# Altium PCB TFT_2.2-inch_ILI9341_Pcb.PcbDoc
Units mil, origin at the board's own origin, x right, y up, seen from the top; angles counter-clockwise.
Board outline 2670 x 1610 mil, 2 copper layers (Top Layer, Bottom Layer); 19 components, 13 nets, 87 pads, 24 vias.
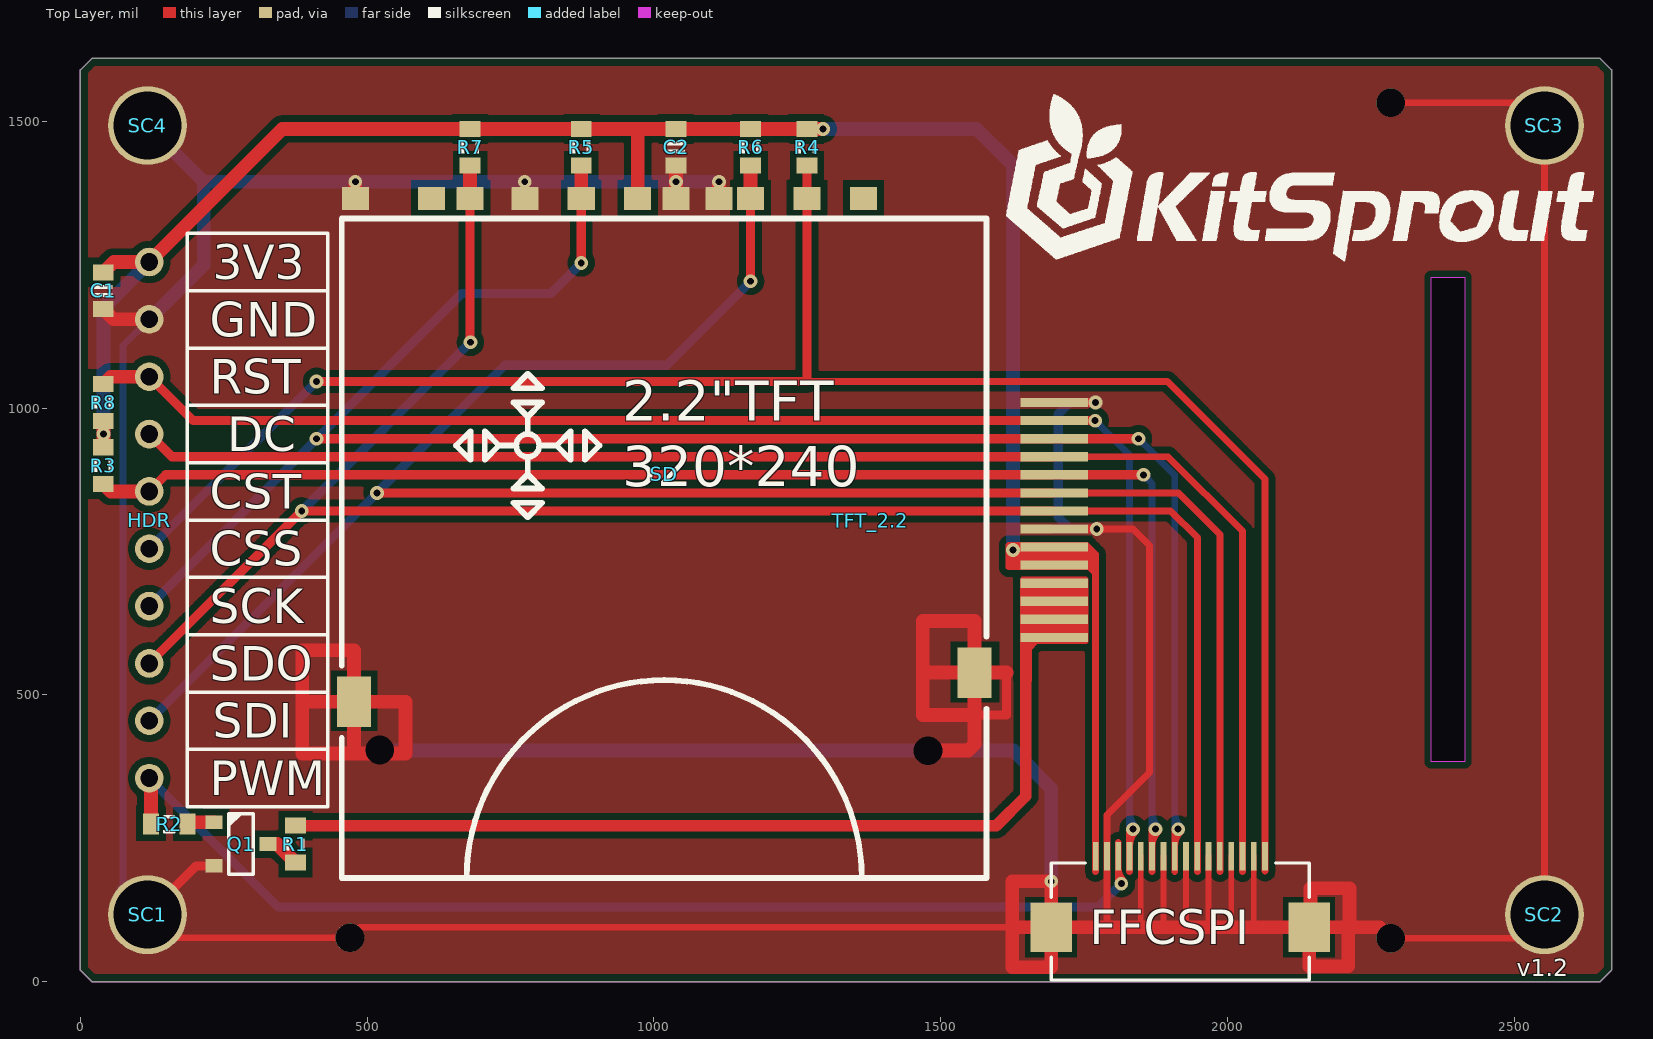
[diagram p0: Top Layer view]
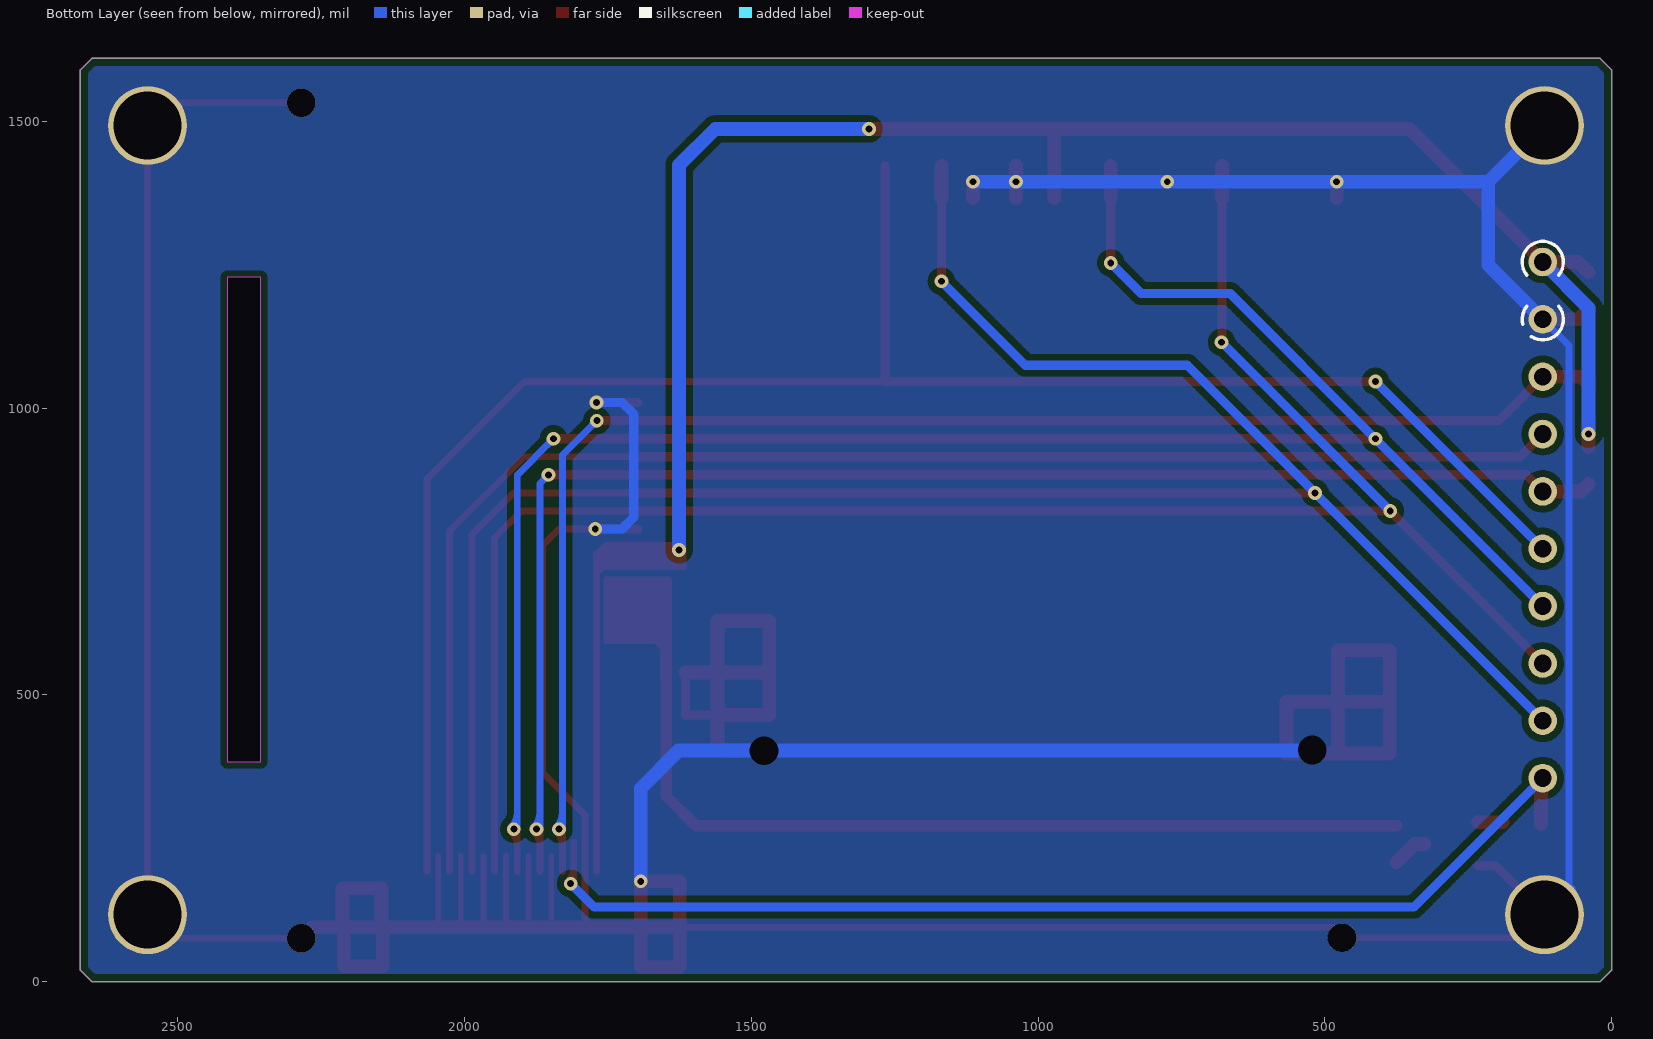
[diagram p1: Bottom Layer view, seen from below]
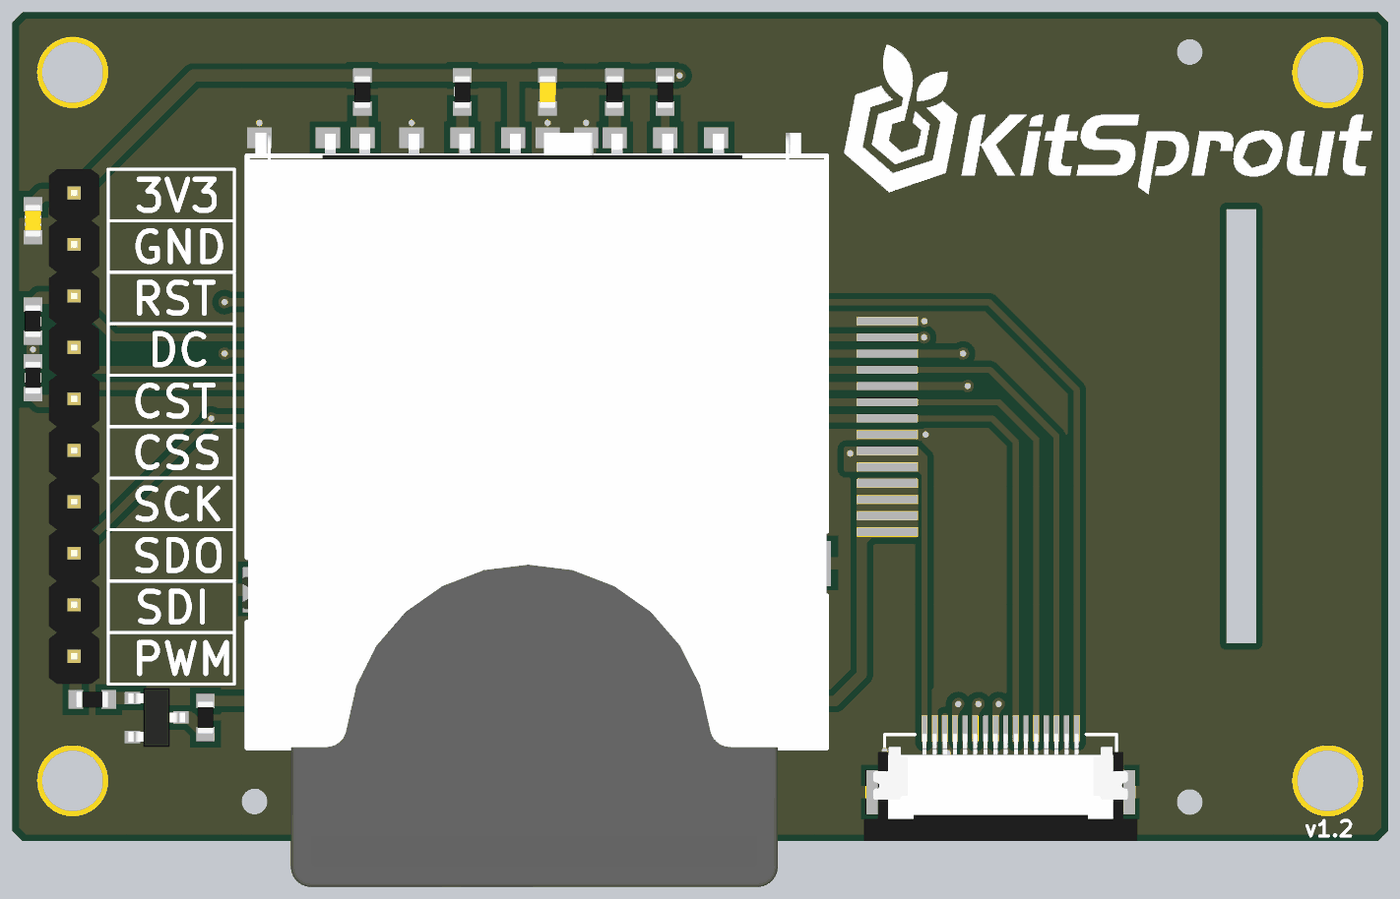
[diagram p2: 3D render of the assembled board from above, using the file's embedded part models]

## Layer stack, top to bottom
Top Solder: solder mask 0.4, Solder Resist, Dk 3.5
Top Layer: signal copper 1.4
Dielectric1: dielectric 12.6, FR-4, Dk 4.8
Bottom Layer: signal copper 1.4
Bottom Solder: solder mask 0.4, Solder Resist, Dk 3.5

## Board outline
0,20 20,0 2650,0 2670,20 2670,1590 2650,1610 20,1610 0,1590

## Design rules (kind name [scope] priority, off if disabled: settings)
Clearance ClearancePolygon [InPolygon] p1: gap=12
Clearance [All] p2: gap=6
ComponentClearance [All] p1: gap=0 collisioncheckmode=3 verticalgap=0 showdistances=FALSE
Height [All] p1: minheight=0 maxheight=5000 prefheight=500
HoleSize [All] p1: absolutevalues=TRUE maxlimit=200 minlimit=1 maxpercent=80.000 minpercent=20.000
HoleToHoleClearance [All] p1: gap=6 allowstackedmicrovias=TRUE
MinimumSolderMaskSliver [All] p1: minsoldermaskwidth=6
PlaneConnect [All] p1: planeconnectstyle=Direct reliefexpansion=20 reliefentries=4 reliefconductorwidth=20 reliefairgap=10
PolygonConnect [All] p1: connectstyle=Direct reliefconductorwidth=20 reliefentries=4 polygonreliefangle="90 Angle" airgapwidth=10
RoutingVias [All] p1: holewidth=12 width=20 viastyle="Through Hole" minholewidth=12 minwidth=20 maxholewidth=100 maxwidth=200
SilkToSilkClearance [All] p1: silktosilkclearance=0
SilkToSolderMaskClearance SilkscreenOverComponentPads [IsPad] p1: minsilkscreentomaskgap=1 clearancetoexposedcopper=TRUE
SolderMaskExpansion [All] p1: expansion=0
Width [All] p1: maxlimit=30 minlimit=6 preferedwidth=10
21 further rules are at their usual default settings.

## Components (designator, comment, footprint, x,y, rotation, side; value= is the part's Value field where it differs from the comment)
C1 "Cap_0603" CAP_0603 40,1205 r90 top
C2 "Cap_0603" CAP_0603 1038.67,1455 r90 top
FFCSPI "FFC_0.5_16" FFC_0.5_16 1918,155 r0 top locked
HDR "HDR1x10_2.54" HDR1X10_2.54_180 120,1255 r0 top
Q1 "BJT_NPN" SOT23-3 280,240 r0 top
R1 "Res_0603" RES_0603 375,240 r90 top
R2 "Res_0603" RES_0603 155,275 r180 top
R3 "Res_0603" RES_0603 40,900 r270 top
R4 "Res_0603" RES_0603 1267.02,1455 r270 top
R5 "Res_0603" RES_0603 873.32,1455 r270 top
R6 "Res_0603" RES_0603 1168.59,1455 r270 top
R7 "Res_0603" RES_0603 679.42,1455 r270 top
R8 "Res_0603" RES_0603 40,1010 r90 top
SC1 "M3" SCRREW_M3 117,117 r0 top locked
SC2 "M3" SCRREW_M3 2553,117 r0 top locked
SC3 "M3" SCRREW_M3 2553,1493 r0 top locked
SC4 "M3" SCRREW_M3 117,1493 r0 top locked
SD "SD_Card" SD_Card_1 1018,705 r0 top locked
TFT_2.2 "TFT_2.2_ILI9341" TFT_2.2_320x240_ILI9341 2422,16 r90 top locked

## Footprints (in the part's own frame and the unit in brackets; to place one, negate y for a bottom-side part, rotate by r counter-clockwise, add the part's x,y. Pads: shape width x height; smd on the part's side, far side on the other; paste and mask are expansions set on the pad)
CAP_0603 [mil]
  rect 28x36 smd: 1(-32,0) 2(32,0)
  silkscreen extent -10,-16 10,16, body extent -31,-16 32,16, height 36
FFC_0.5_16 [mil]
  rect 72x86 smd mask+1: 0(-225,-60) 0(225,-60)
  rect 10x50 smd mask+1: 1(-147.64,64) 2(-127.95,64) 3(-108.27,64) 4(-88.58,64) 5(-68.9,64) 6(-49.21,64) 7(-29.53,64) 8(-9.84,64) 9(9.84,64) 10(29.53,64) 11(49.21,64) 12(68.9,64) 13(88.58,64) 14(108.27,64) 15(127.95,64) 16(147.64,64)
  silkscreen extent -225,-152 225,52, body extent -266,-155 266,55, height 82
HDR1X10_2.54_180 [mil]
  round 50 hole 31: 1(0,0) 2(0,-100) 3(0,-200) 4(0,-300) 5(0,-400) 6(0,-500) 7(0,-600) 8(0,-700) 9(0,-800) 10(0,-900)
  body extent -49,-950 49,50, height 323
RES_0603 [mil]
  rect 28x36 smd: 1(-32,0) 2(32,0)
  silkscreen extent -10,-16 10,16, body extent -31,-16 32,16, height 20
SCRREW_M3 [mm]
  round 3.5 hole 3 mask+0: 0(0,0)
SD_Card_1 [mil]
  rect 47.24x40 smd: 1(249.02,661) 2(150.59,661) 3(20.67,661) 4(-46.26,661) 5(-144.69,661) 6(-243.11,661) 7(-338.58,661) 8(-405.51,661) 9(347.44,661) 10(95.47,661) 11(-538.58,661)
  rect 60x88 smd: 3(-541,-217) 3(541,-166)
  round 40 hole 50 mask+0: 3(-496,-301) 3(460,-302)
  silkscreen extent -562,-524 562,626, body extent -572,-794 562,671, height 104
SOT23-3 [mil]
  rect 30x24 smd: 1(-47,38) 2(-47,-38) 3(47,0)
  silkscreen extent -21,-53 21,53, body extent -55,-57 55,57, height 51
TFT_2.2_320x240_ILI9341 [mil]
  round 50 hole 50 unplated mask+0: 1(59.74,137) 1(60.74,1952) 1(1516.74,137)
  rect 16x118 smd mask+1: 1(993.87,724) 2(962.38,724) 3(930.88,724) 4(899.39,724) 5(867.89,724) 6(836.39,724) 7(804.9,724) 8(773.4,724) 9(741.9,724) 10(710.41,724) 11(678.91,724) 12(647.42,724) 13(615.92,724) 14(584.42,724)
  Keep-Out Layer board cut-out: 1212,66.34 1212,8.23 367.78,8.23 367.78,66.34

## Part data
C1 C2: "Capacitor"
FFCSPI: "FFC"
HDR: "Header"
Q1: "Transistor"
R1 R2 R3 R4 R5 R6 R7 R8: "Resistor"
SC1 SC2 SC3 SC4: library part Screw_M3, "Screw"
SD: "SD"
TFT_2.2: "TFT"

## Via types
v1: diameter 24, hole 12, Top Layer to Bottom Layer, 24 vias

## Nets (pads, with @x,y where several pads share a name; then routed paths per layer and width w, separated by ;. In a path a pad name is that pad's centre, name@x,y a point inside that pad or via, vN(x,y) a via of type N, cw(c..) or ccw(c..) an arc to the next point about the centre after c; other vN are vias at no path point)
3V3: C1.2 C2.2 FFCSPI.1 HDR.1 R3.1 R4.1 R5.1 R6.1 R7.1 R8.1 SD.4 TFT_2.2.9 TFT_2.2.10 | length 3497.7
  Top Layer w12: TFT_2.2.9 1727.1,757.9 1770,715 1770,192.11
  Top Layer w24: R3.1 v1(40,955) R8.1 ; C1.2 58,1255 HDR.1 352,1487 R7.1 R5.1 C2.2 R6.1 v1(1295,1487) ; SD.4 971.74,1485.26
  Bottom Layer w24: v1(40,955) 40,1175 HDR.1 ; v1(1295,1487) 1563,1487 1626,1424 v1(1626,753)
CSS: FFCSPI.16 HDR.6 R4.2 SD.1 | length 3197
  Top Layer w12: 1267.02,1046.83 1895.28,1046.83 2065.75,876.36 2065.75,192.74
  Top Layer w16: v1(411.83,1046.83) 1267.02,1046.83 R4.2
  Bottom Layer w16: HDR.6 v1(411.83,1046.83)
CST: FFCSPI.6 HDR.5 R3.2 TFT_2.2.5 | length 2599.8
  Top Layer w12: 1868.9,192 v1@1868.9,266 ; FFCSPI.6@1868.9,237.03 cw(c1903.87,237.03) v1@1879.14,261.76
  Top Layer w16: HDR.5 148.89,883.89 v1@1846.66,883.89
  Top Layer w24: R3.2 53,855 HDR.5
  Bottom Layer w12: v1@1854,877.89 cw(c1854,863.4) 1864.24,873.65 cw(c1874.49,883.89) v1@1860,883.89 ; v1(1854,883.89) 1868.9,868.99 v1@1868.9,266 ; 1868.9,294.97 ccw(c1903.87,294.97) v1@1879.14,270.24
  other v1: 1874.9,266
DC: FFCSPI.14 HDR.4 TFT_2.2.4 | length 2570.8
  Top Layer w12: TFT_2.2.4@1697.34,915.39 1896.61,915.39 2026.38,785.62 2026.38,192
  Top Layer w16: HDR.4 159.61,915.39 TFT_2.2.4
GND: C1.1 C2.1 FFCSPI.0 FFCSPI.2 FFCSPI.5 FFCSPI.7 FFCSPI.9 FFCSPI.11 FFCSPI.13 FFCSPI.15 HDR.2 Q1.2 SC1.0 SC2.0 SC3.0 SC4.0 SD.3 SD.6 SD.10 SD.11 TFT_2.2.1 TFT_2.2.8 | length 12953.1
  Top Layer w10: FFCSPI.5 1849.1,95.9 1850,95 ; 1888.47,95.9 FFCSPI.7 ; 1927.84,95.9 FFCSPI.9 ; 1967.21,95.9 FFCSPI.11 ; 2006.58,95.9 FFCSPI.13 ; 2045.95,95.9 FFCSPI.15
  Top Layer w12: SC1.0 157.26,76.74 470,76.74 488.26,95 1625,95 ; v1(1772.34,789.4) 1835.6,789.4 1864.11,760.89 1864.11,365 1790.05,290.94 1790.05,95 ; v1@1776.58,785.16 cw(c1786.82,774.92) 1786.82,789.4 cw(c1786.82,803.89) v1@1776.58,793.64 ; TFT_2.2.1@2285,75.74 2511.74,75.74 SC2.0 SC3.0 2513.26,1532.74 TFT_2.2.1@2285,1532.74
  Top Layer w15: TFT_2.2.8@1697.34,789.4 v1(1772.34,789.4)
  Top Layer w16: SC1.0 202,202 Q1.2 ; 1559,465 1615,465 1615,539 ; TFT_2.2.1@1698,1009.87 v1(1770,1009.87)
  Top Layer w24: C1.1 58,1155 HDR.2 ; SD.11 v1(479.42,1395) ; SD.3@1038.67,1366 C2.1 ; SD.10 v1(1113.47,1395) ; SD.3@1478,403 1548,403 1559,414 SD.3@1559,539 ; 1559,465 1469,465 1469,539 ; 1615,539 SD.3@1559,539 ; FFCSPI.0@2145,95 2145,163 2213,163 2213,95 ; 2211,95 2211,27 2143,27 FFCSPI.0@2143,95 ; TFT_2.2.1@2285,75.74 2265.74,95 FFCSPI.0@2143,95 ; 387,488 SD.3@477,488 ; 387,488 387,398 477,398 ; 387,488 387,578 477,578 SD.3@477,488 ; 477,398 SD.3@477,488 ; 477,398 567,398 567,488 SD.3@477,488 ; 1469,539 SD.3@1559,539 ; 1469,539 1469,629 1559,629 SD.3@1559,539 ; 1625,95 1625,175 v1(1693,175) FFCSPI.0@1693,95 ; 1625,95 1625,25 1693,25 FFCSPI.0@1693,95 ; 1625,95 FFCSPI.0@1693,95 ; FFCSPI.0@1693,95 1790.05,95 1850,95 FFCSPI.0@2143,95
  Bottom Layer w12: SC1.0@74.43,159.57 74.43,1109.43 HDR.2
  Bottom Layer w16: v1(1770,1009.87) 1724.87,1009.87 1705,990 1705,810 1725.6,789.4 v1(1772.34,789.4)
  Bottom Layer w24: SC1.0@74.43,159.57 SC1.0 ; SC4.0 215,1395 ; HDR.2 215,1250 215,1395 ; SD.3@523,403 1478,403 1627,403 1693,337 v1(1693,175) ; v1(1113.47,1395) v1(774.89,1395) v1(479.42,1395) 215,1395
  other v1: 1038.67,1395
LEDK: R1.2 TFT_2.2.11 TFT_2.2.12 TFT_2.2.13 TFT_2.2.14 | length 1614.9
  Top Layer w20: R1.2 1597,272 1648.77,323.77 1648.77,589.77 1659.42,600.42 TFT_2.2.14
NetQ1_1: Q1.1 R2.1 | length 43
  Top Layer w24: R2.1@190,278 Q1.1
NetQ1_3: Q1.3 R1.1 | length 61.3
  Top Layer w24: Q1.3 343,240 R1.1
PWM: FFCSPI.3 HDR.10 R2.2 | length 1986.2
  Top Layer w12: FFCSPI.3@1809.84,198.2 ccw(c1842.31,198.2) v1@1819.35,175.24 ; FFCSPI.3@1809.84,243 1809.84,176.27 v1(1815.11,171)
  Top Layer w24: HDR.10 123,352 R2.2
  Bottom Layer w16: HDR.10 345,130 1774.11,130 v1(1815.11,171)
RST: FFCSPI.4 HDR.3 R8.2 TFT_2.2.2 | length 2750.4
  Top Layer w12: TFT_2.2.2 v1(1769.49,978.38) ; v1@1765.25,974.14 ccw(c1755,963.89) 1755,978.38 ccw(c1755,992.86) v1@1765.25,982.62 ; 1829.53,192 v1@1829.53,266 ; FFCSPI.4@1829.53,237.03 cw(c1864.5,237.03) v1@1839.77,261.76
  Top Layer w16: HDR.3 196.62,978.38 v1@1770.15,978.38
  Top Layer w24: R8.2 53,1055 HDR.3
  Bottom Layer w12: v1@1769.49,972.38 cw(c1769.49,957.89) 1779.73,968.14 cw(c1789.97,978.38) v1@1775.49,978.38 ; v1(1769.49,978.38) 1829.53,918.34 v1@1829.53,266 ; 1829.53,294.97 ccw(c1864.5,294.97) v1@1839.77,270.24
  other v1: 1835.53,266
SCK: FFCSPI.8 HDR.7 R5.2 SD.5 TFT_2.2.3 | length 3463.5
  Top Layer w12: 1908.27,192 v1@1908.27,266 ; FFCSPI.8@1908.27,237.03 cw(c1943.24,237.03) v1@1918.51,261.76
  Top Layer w16: v1(411.77,946.88) v1@1845.65,946.88 ; v1(873.31,1253.31) SD.5
  Top Layer w24: SD.5 R5.2
  Bottom Layer w12: v1@1844.99,940.88 cw(c1844.99,926.4) 1855.23,936.64 cw(c1865.48,946.88) v1@1850.99,946.88 ; v1(1844.99,946.88) 1908.27,883.61 v1@1908.27,266 ; 1908.27,294.97 ccw(c1943.24,294.97) v1@1918.51,270.24
  Bottom Layer w16: HDR.7 v1@411.83,946.83 ; v1(411.77,946.88) 664.89,1200 820,1200 v1(873.31,1253.31)
  other v1: 1914.27,266
SDI: FFCSPI.12 HDR.9 R6.2 SD.2 TFT_2.2.6 | length 3656.5
  Top Layer w12: TFT_2.2.6@1697.34,852.39 1914.61,852.39 1987.01,779.99 1987.01,192
  Top Layer w16: v1(517.17,852.39) TFT_2.2.6 ; v1(1168.59,1221.41) SD.2
  Top Layer w24: SD.2 R6.2
  Bottom Layer w16: HDR.9 v1@517.5,852.5 ; v1(517.17,852.39) 739.77,1075 1022.18,1075 v1(1168.59,1221.41)
SDO: FFCSPI.10 HDR.8 R7.2 SD.7 TFT_2.2.7 | length 3264
  Top Layer w12: TFT_2.2.7@1697.34,820.9 1901.1,820.9 1947.64,774.36 1947.64,192
  Top Layer w16: HDR.8 v1(385.9,820.9) TFT_2.2.7 ; v1@679.42,1115 SD.7
  Top Layer w24: SD.7 R7.2
  Bottom Layer w16: v1(385.9,820.9) v1(680,1115)
pads on no net: SD.8 SD.9

## Polygon pours and split planes (outlines as drawn)
GND on Top Layer "Mechanical 1-No Net" (hatched 90Degree grid 2 track 4, remove dead copper, pour order 4): 0,0 2670,0 2670,1610 0,1610
GND on Bottom Layer "Mechanical 1-No Net" (hatched 90Degree grid 2 track 4, remove dead copper, pour order 3): 0,0 2670,0 2670,1610 0,1610

## Keep-outs
Keep-Out Layer:
  the board outline again, w2

## Other copper
Top Layer:
  region net LEDK: 1757.77,703 1754.77,706 1641.77,706 1638.77,703 1638.77,524 1658.77,524 1658.77,579 1668.77,589 1754.77,589 1757.77,592
  region net 3V3: 1616.77,766 1756.77,766 1776,746.77 1776,204 1764,204 1764,710.77 1756.77,718 1616.77,718 1613.77,721 1613.77,763
  pour cut-out: 1756,255.13 2080,254.81 2080,180 1756,180
  pour cut-out: 1645,150 1740,150 1740,40 1645,40
  pour cut-out: 2095,150 2190,150 2190,40 2095,40
  pour cut-out: 1515,595 1605,595 1605,485 1515,485
  pour cut-out: 435,545 520,545 520,435 435,435

## Silkscreen, mask and mechanical layers (free items; w line width, h text height)
Top Overlay:
  drawing of 3339 lines, arcs and shapes, not listed
  text "3V3" at 230.89,1225 h60
  text "GND" at 225.89,1125 h60
  text "RST" at 225.89,1025 h60
  text "2.2\"TFT" at 945,955 h120
  text "DC" at 255.89,925 h60
  text "320*240" at 945,840 h120
  text "CST" at 225.89,825 h60
  text "CSS" at 225.89,725 h60
  text "SCK" at 225.89,625 h60
  text "SDO" at 225.89,525 h60
  text "SDI" at 230.89,425 h60
  text "PWM" at 225.89,325 h60
  text "v1.2" at 2504.5,9.5 h30
Bottom Overlay:
  lines w6: 92.42,1178.14 ccw(c120,1155) 139.97,1125.05 ; 92.42,1231.86 cw(c120,1255) 147.58,1231.86 ; 147.58,1178.14 cw(c120,1155) 154.93,1146.27
Mechanical 1:
  the board outline again, w2

## Dimensions
2650,1610 to 2650,0 on Mechanical 13
0,1590 to 2670,1590 on Mechanical 13